# EAGLE board sensormodule (EAGLE 9.1.3)
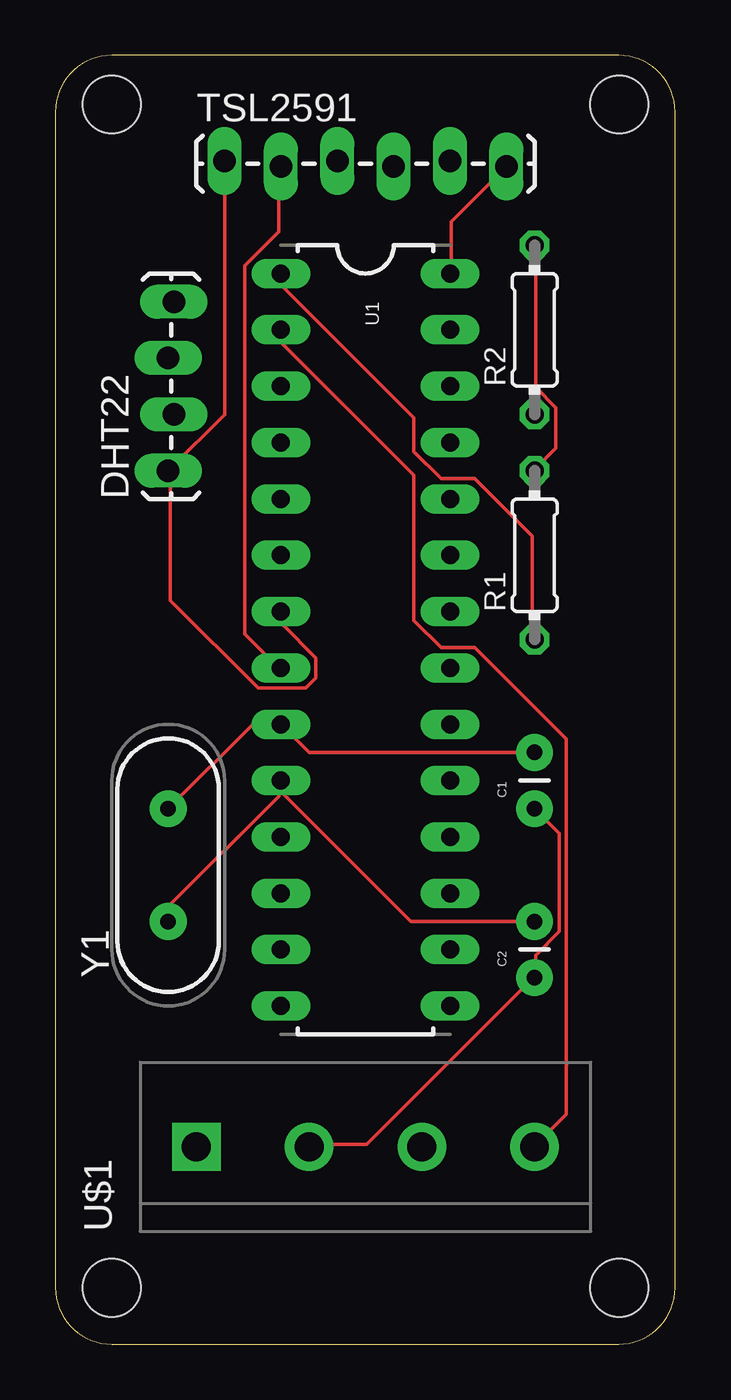
[diagram p0: board, top side]
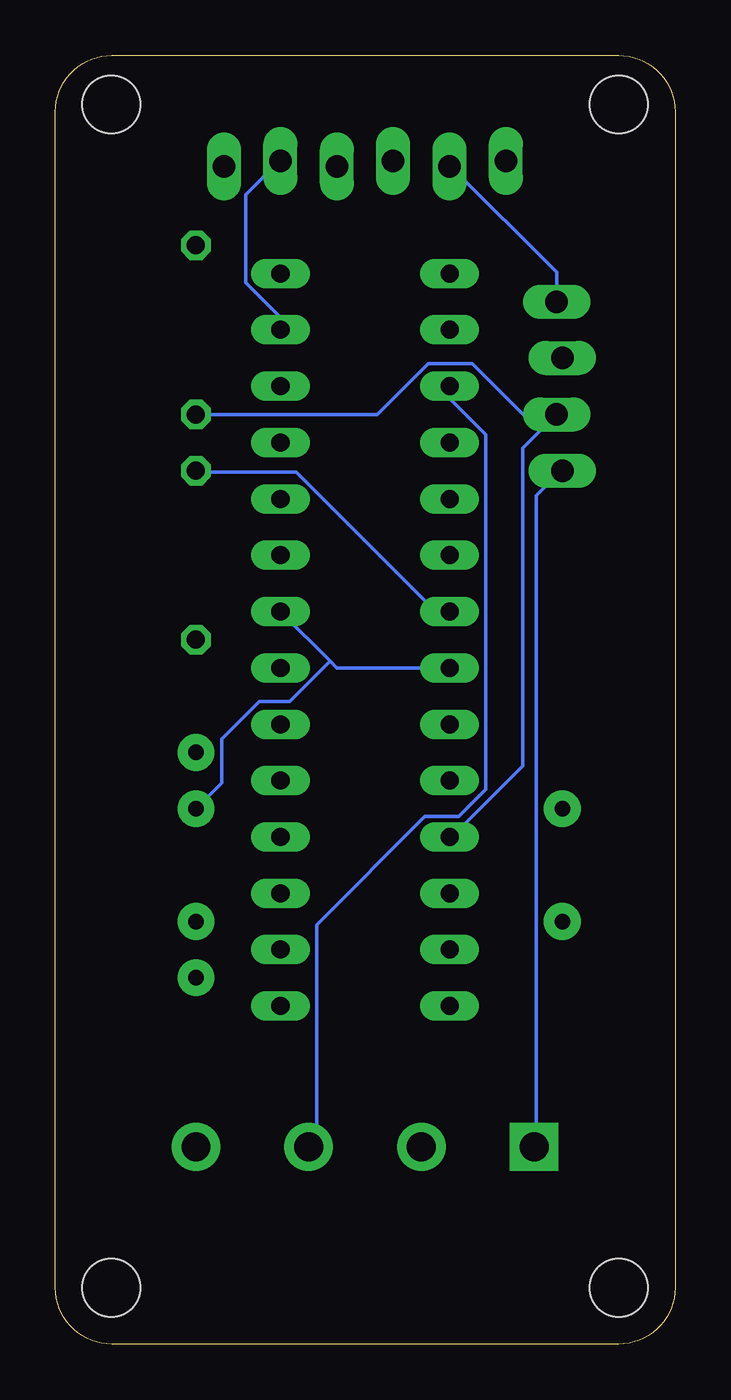
[diagram p1: board, bottom side, seen from below]

Size 27.92 x 58.09 mm. Coordinates in mm from the lower left corner, seen from the top.
Outline: 0,55.55 0,2.54 arc90 2.54,0 25.38,0 arc90 27.92,2.54 27.92,55.55 arc90 25.38,58.09 2.54,58.09 arc90 0,55.55
Copper layers (1*16): Top 0.035mm / dielectric 1.5mm / Bottom 0.035mm
Design rules "default": minimum track width 6mil, minimum drill 0.35mm, track to track 6mil, track to pad 6mil, pad to pad 6mil, via to via 6mil, smd to smd 6mil, copper to edge 40mil, drill to drill 6mil, minimum pad ring 10mil, minimum via ring 8mil, stop-mask expansion 4mil, vias tented up to drill 0mil, thermal gap 10mil
Holes 2.6 mm at 2.54,55.88 25.4,55.88 2.54,2.54 25.4,2.54

## Footprints (pad centres in the part's own frame; a part is rotated, then mirrored left to right if it is on the bottom)
CAP-PTH-SMALL = drill 0.7 pad 1.651: 1 0,0; 2 2.54,0
1X04_LOCK_LONGPADS = drill 1.016 long: 1 0,0; 2 2.54,-0.254; 3 5.08,0; 4 7.62,-0.254
0204/7 = drill 0.813 octagon: 1 -3.81,0; 2 3.81,0
1X06_LOCK_LONGPADS = drill 1.016 long: 1 0,0; 2 2.54,-0.254; 3 5.08,0; 4 7.62,-0.254; 5 10.16,0; 6 12.7,-0.254
DIL28-3 = drill 0.813 long: 1 -16.51,-3.81; 2 -13.97,-3.81; 3 -11.43,-3.81; 4 -8.89,-3.81; 5 -6.35,-3.81; 6 -3.81,-3.81; 7 -1.27,-3.81; 8 1.27,-3.81; 9 3.81,-3.81; 10 6.35,-3.81; 11 8.89,-3.81; 12 11.43,-3.81; 13 13.97,-3.81; 14 16.51,-3.81; 15 16.51,3.81; 16 13.97,3.81; 17 11.43,3.81; 18 8.89,3.81; 19 6.35,3.81; 20 3.81,3.81; 21 1.27,3.81; 22 -1.27,3.81; 23 -3.81,3.81; 24 -6.35,3.81; 25 -8.89,3.81; 26 -11.43,3.81; 27 -13.97,3.81; 28 -16.51,3.81
I2C_TERM = drill 1.3 pad 2.184 square: 1 0,7.62 | drill 1.3 pad 2.184: 2 0,2.54; 3 0,-2.54; 4 0,-7.62
HC49US = drill 0.7 pad 1.651: 1 -2.54,0; 2 2.54,0

## Placement (x,y rotation side)
C1  20pF  [CAP-PTH-SMALL]  21.59,24.13 90 top
C2  20pF  [CAP-PTH-SMALL]  21.59,16.51 90 top
DHT22  [1X04_LOCK_LONGPADS]  5.08,39.37 90 top
R1  4.7k  [0204/7]  21.59,35.56 90 top
R2  10k  [0204/7]  21.59,45.72 90 top
TSL2591  [1X06_LOCK_LONGPADS]  7.62,53.34 0 top
U1  ATMEGA328P_PDIP  [DIL28-3]  13.97,31.75 270 top
U$1  UART  [I2C_TERM]  13.97,8.89 90 top
Y1  16MHz  [HC49US]  5.08,21.59 90 top

## Library data of the parts
C1 C2 = 001_SparkFun-Capacitors
DHT22 = 001_SparkFun-Connectors; PROD_ID: CONN-09696
R1 R2 = resistor
TSL2591 = 001_SparkFun-Connectors
U1 = 001_SparkFun-DigitalIC
U$1 = 000_CropQuant
Y1 = 001_SparkFun-FreqCtrl

## Nets
N$1: R1.1 U1.1
N$2: C1.2 U1.9 Y1.2
N$3: C2.2 U1.10 Y1.1
N$4: DHT22.1 R1.2 R2.2 TSL2591.1 U1.7 U$1.1
N$5: DHT22.2 R2.1 U1.11
N$6: C1.1 C2.1 DHT22.4 TSL2591.2 U1.8 U1.22 U$1.2
N$7: TSL2591.5 U1.27
N$8: TSL2591.6 U1.28
N$9: U1.3 U$1.3
N$10: U1.2 U$1.4

## Tracks (layer width: path | path; a pad name or v marks a point on that pad's centre or on a via)
N$1
  Top 0.152: U1.1 10.21,48.16 10.21,47.7 16.15,41.76 16.15,40.23 17.37,39.01 18.9,39.01 21.49,36.42 21.49,31.85 R1.1
N$2
  Top 0.152: Y1.2 5.18,24.23 8.84,27.89 10.06,27.89 U1.9 10.21,27.89 11.43,26.67 21.49,26.67 C1.2
N$3
  Top 0.152: 5.18,19.81 5.18,19.05 Y1.1 5.18,19.81 | 10.06,24.99 10.06,24.69 5.18,19.81 | 10.06,24.99 10.06,25.3 U1.10 10.06,24.99 | 10.06,24.99 16,19.05 21.49,19.05 C2.2
N$4
  Top 0.152: R2.2 21.64,49.53 21.64,43.13 22.55,42.22 22.55,40.39 21.64,39.47 R1.2 | TSL2591.1 7.62,41.91 5.18,39.47 DHT22.1 5.18,39.32 5.18,33.53 9.14,29.57 11.28,29.57 11.73,30.02 11.73,30.94 10.21,32.46 10.21,32.92 U1.7
  Bottom 0.152: 21.49,49.53 R2.2 | U1.7 10.21,33.07 10.82,33.07 17.07,39.32 21.49,39.32 R1.2 | U$1.1 6.25,8.99 6.25,38.25 5.18,39.32 DHT22.1
N$5
  Bottom 0.152: 21.49,41.91 R2.1 21.49,41.91 | DHT22.2 6.1,41.15 | 6.1,41.15 6.86,40.39 6.86,26.06 10.06,22.86 U1.11 | 21.49,41.91 13.41,41.91 11.12,44.2 9.14,44.2 6.1,41.15
N$6
  Top 0.152: C1.1 21.64,24.08 22.71,23.01 22.71,18.59 21.64,17.53 21.64,16.61 C2.1 21.49,16.46 14.02,8.99 11.43,8.99 U$1.2 | TSL2591.2 10.06,53.03 10.06,50.14 8.53,48.62 8.53,32 10.06,30.48 U1.8
  Bottom 0.152: 21.49,24.13 C1.1 21.49,24.23 20.42,25.3 20.42,27.28 18.74,28.96 17.37,28.96 15.55,30.79 | DHT22.4 5.33,47.09 5.33,48.31 10.06,53.03 TSL2591.2 | 15.55,30.79 17.68,32.92 U1.22 | 15.55,30.79 15.24,30.48 10.21,30.48 U1.8
N$7
  Bottom 0.152: U1.27 17.83,45.72 17.83,46.33 19.36,47.85 19.36,51.82 17.83,53.34 TSL2591.5
N$8
  Top 0.152: U1.28 17.83,48.31 17.83,50.6 20.27,53.03 TSL2591.6
N$9
  Bottom 0.152: U1.3 10.06,43.13 10.06,42.52 8.53,41 8.53,24.99 9.75,23.77 11.28,23.77 16.15,18.9 16.15,9.3 16.46,8.99 U$1.3
N$10
  Top 0.152: U1.2 10.21,45.72 10.21,45.11 16.15,39.17 16.15,32.61 17.37,31.39 18.9,31.39 23.01,27.28 23.01,10.36 21.64,8.99 U$1.4

## Text on the board
tDocu: LIGHT | 10k | TEMP | 4.7k | 20pF | 20pF